# Altium PCB plp-ctop_2d.PcbDoc
Units mm, origin at the board's own origin, x right, y up, seen from the top; angles counter-clockwise.
Board outline 35.01 x 41.5 mm, 2 copper layers (Top Layer, Bottom Layer), stack 1.07 mm thick; 8 components, 11 nets, 40 pads, 2 vias.
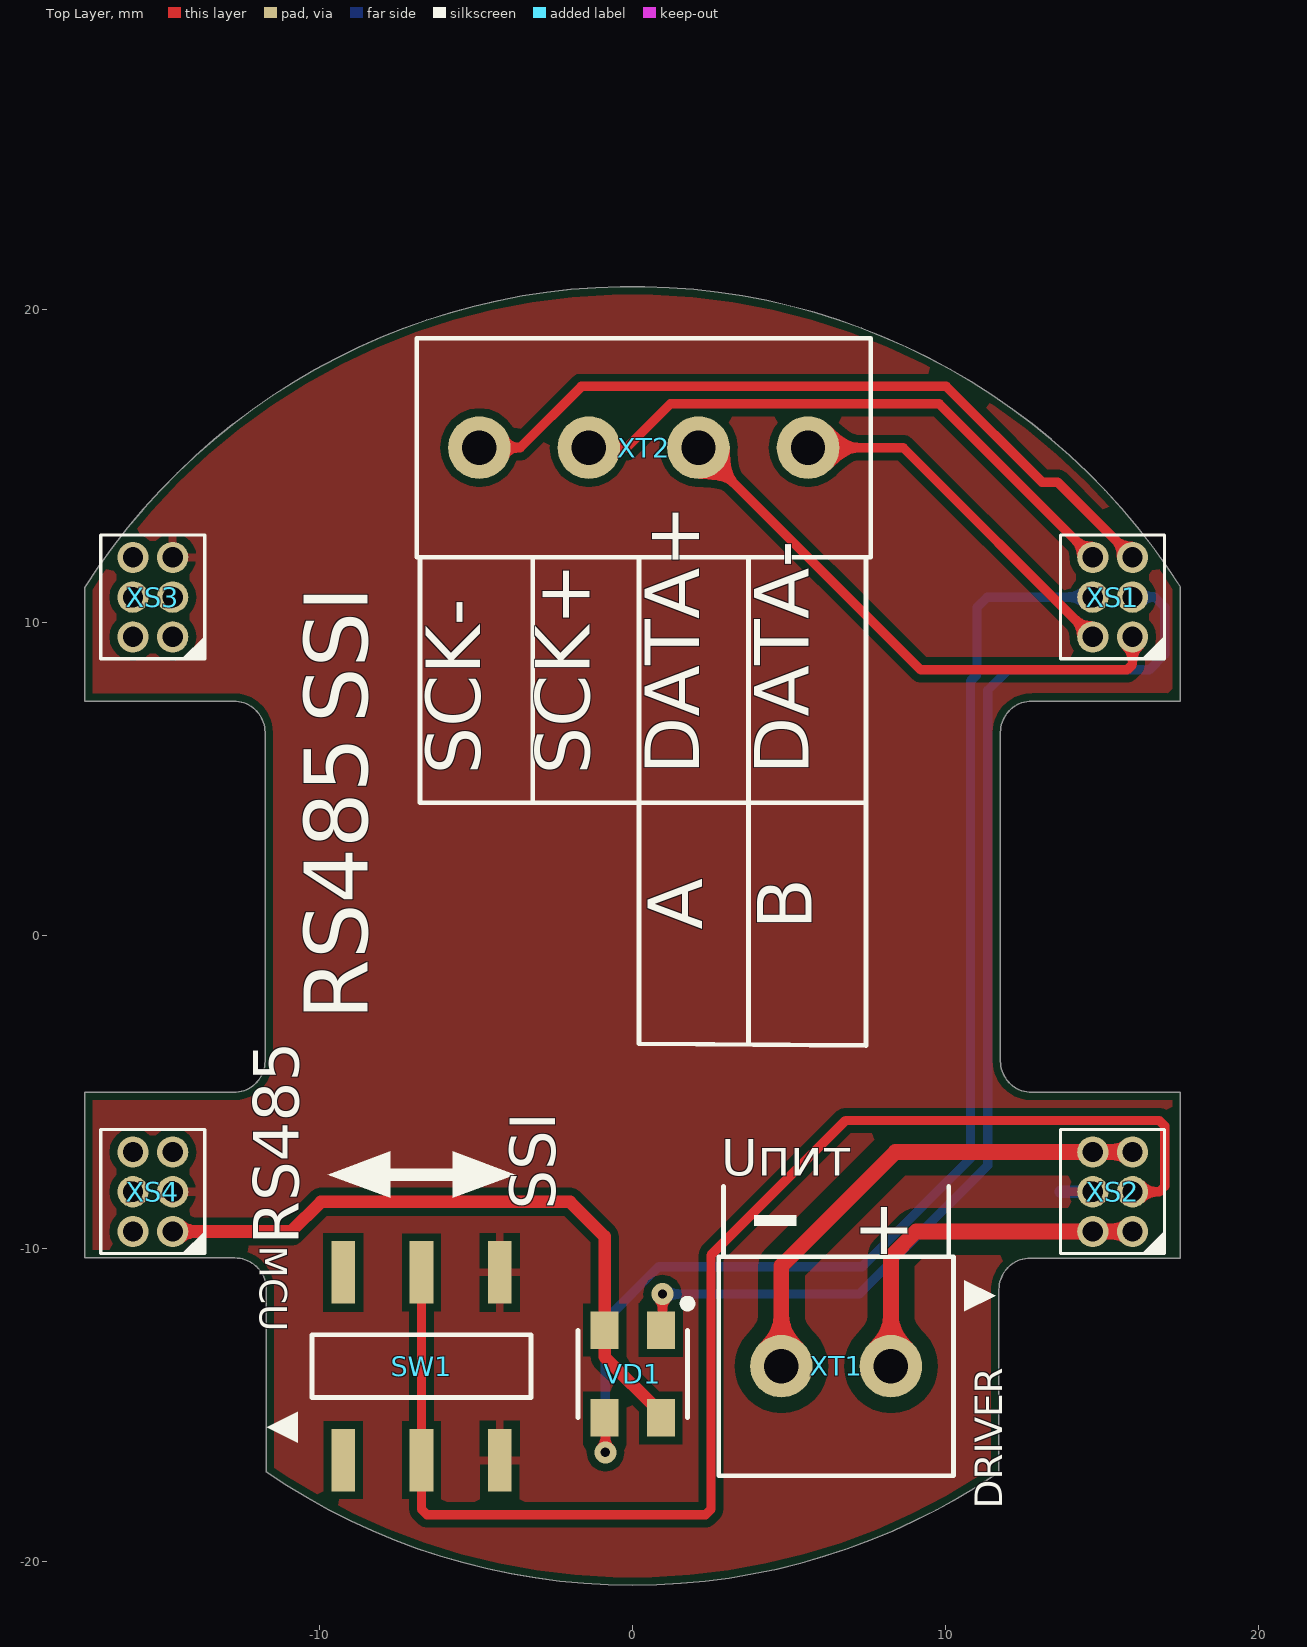
[diagram p0: Top Layer view]
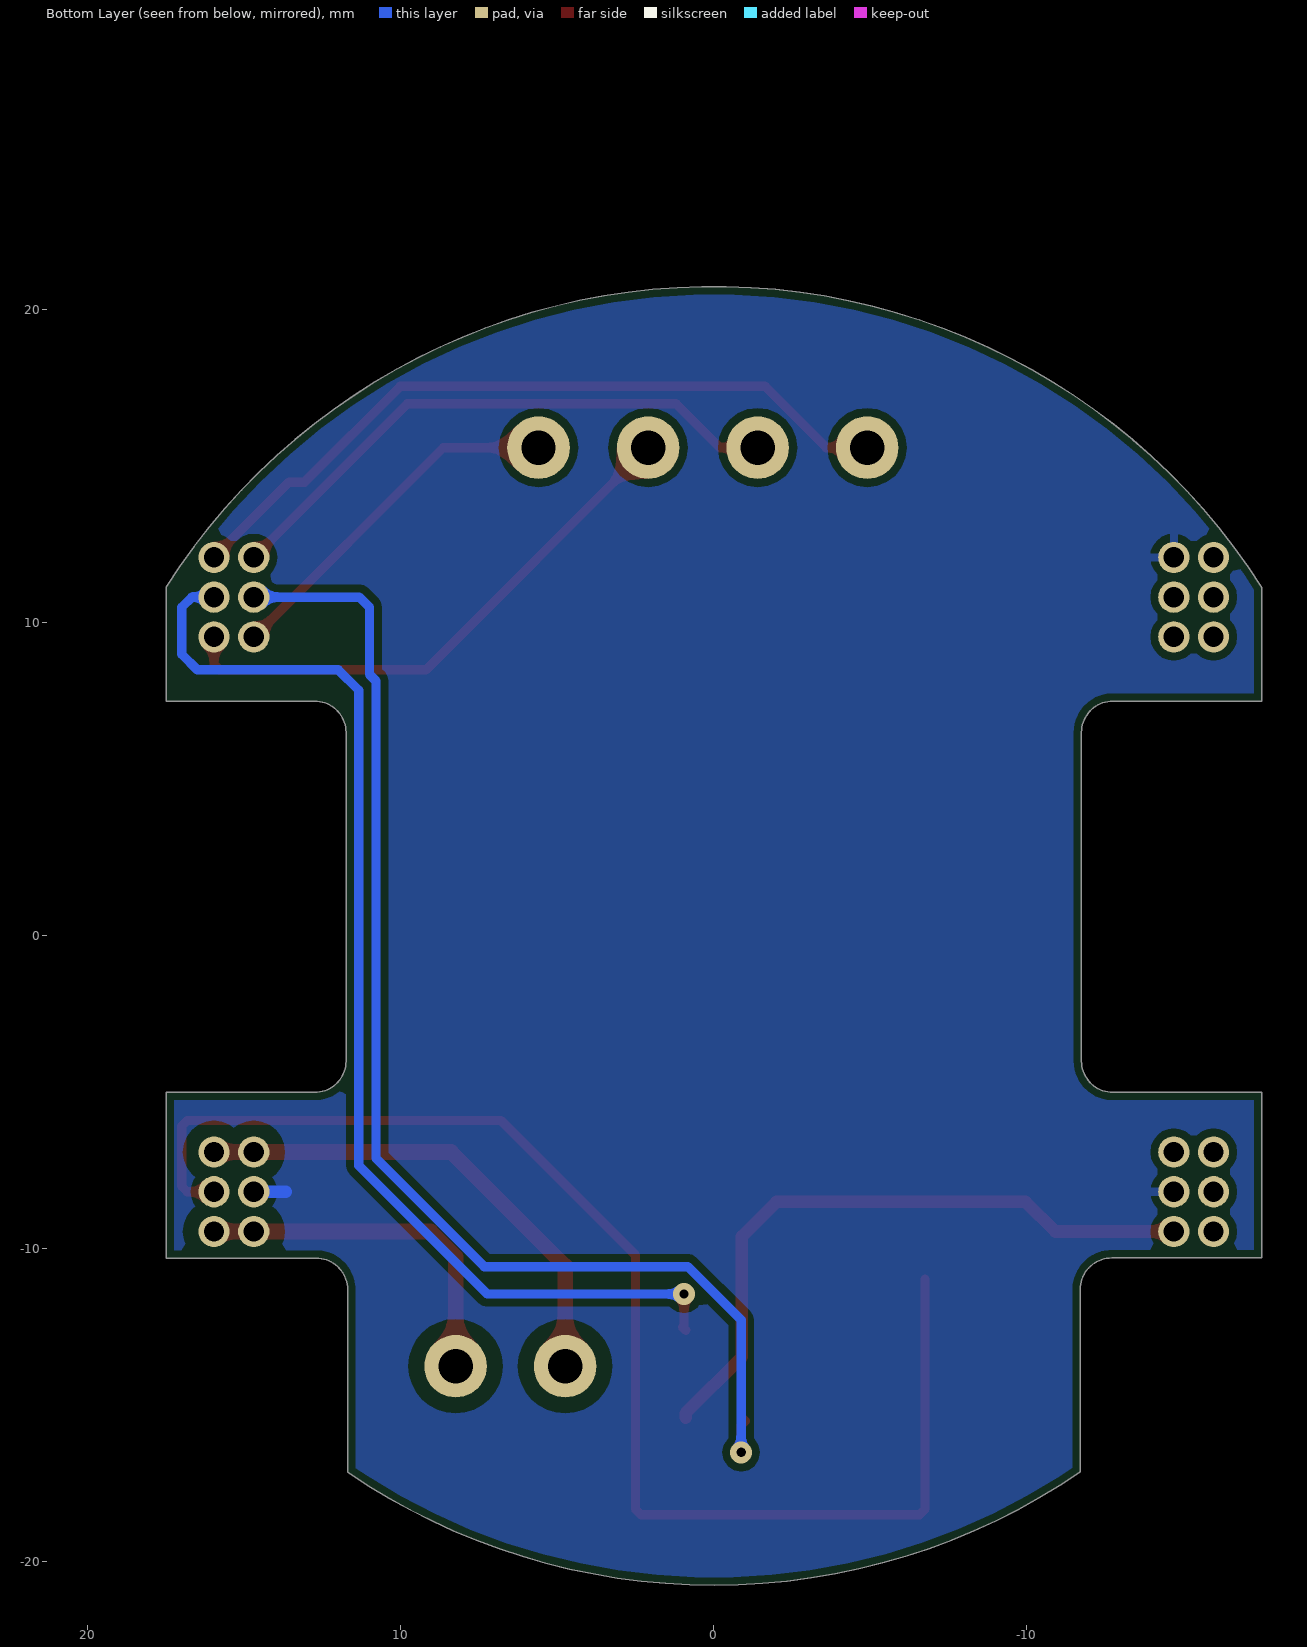
[diagram p1: Bottom Layer view, seen from below]
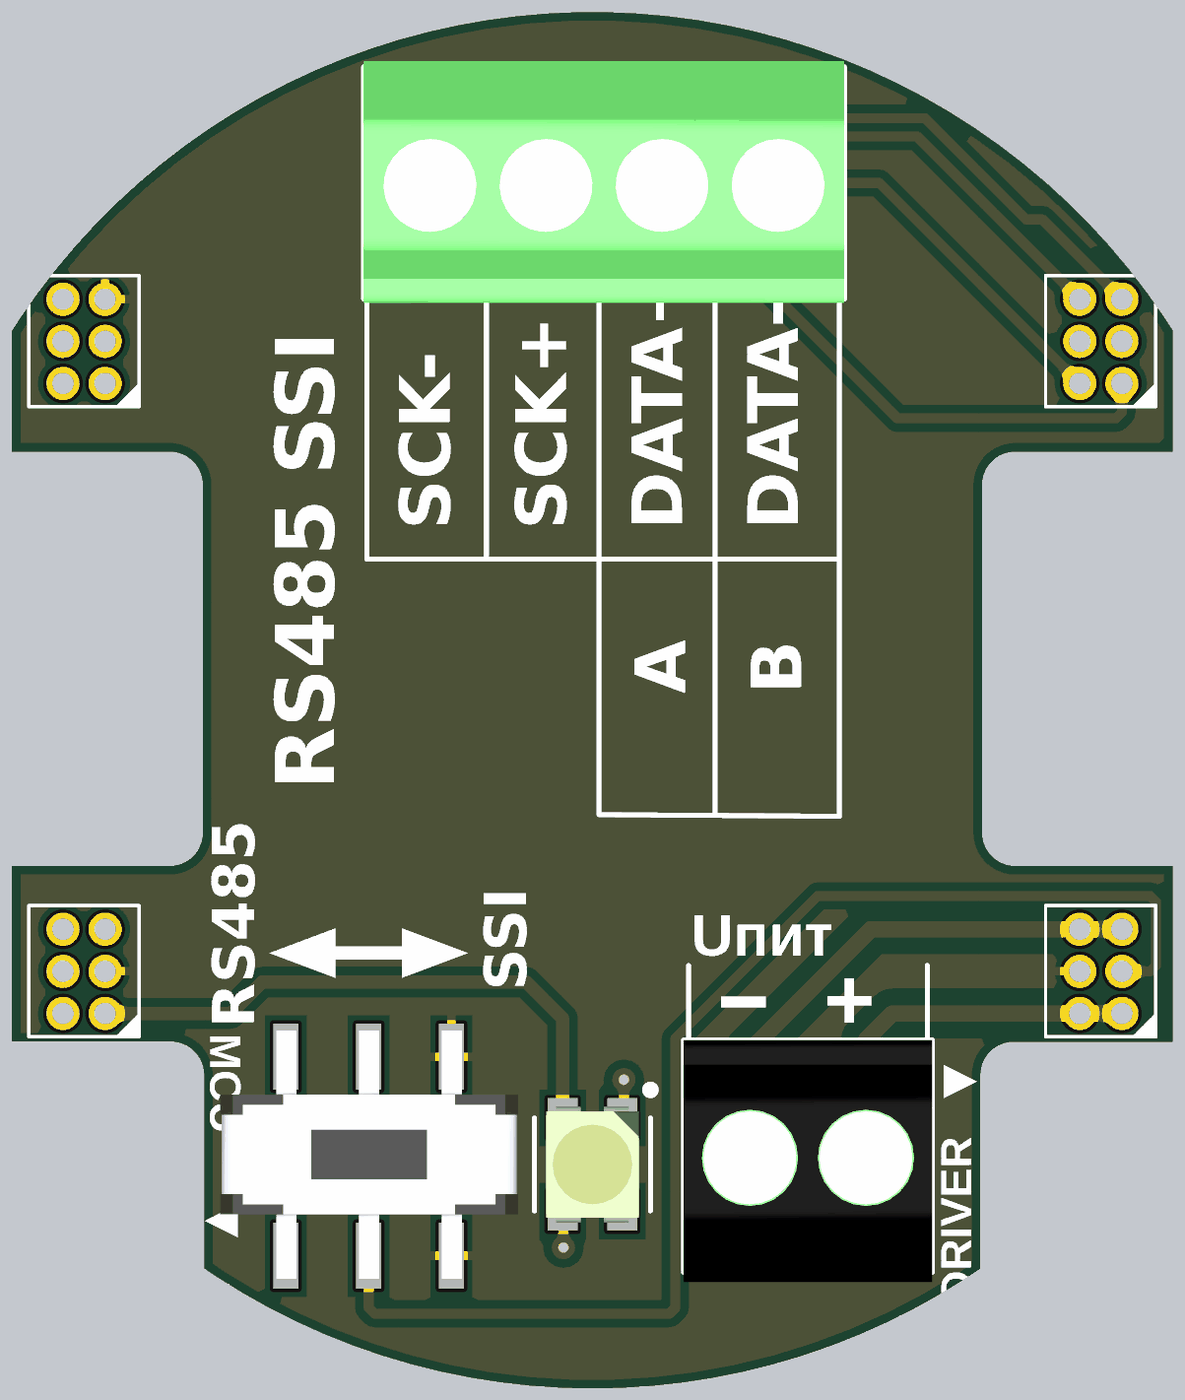
[diagram p2: 3D render of the assembled board from above, using the file's embedded part models]

## Layer stack, top to bottom
Top Solder: solder mask 0.0102, Solder Resist, Dk 3.5
Top Layer: signal copper 0.035
Dielectric1: prepreg 1, FR-4, Dk 4.8
Bottom Layer: signal copper 0.035
Bottom Solder: solder mask 0.0102, Solder Resist, Dk 3.5

## Board outline
-17.511,-10.292 -12.711,-10.292 cw(c-12.711,-11.292) -11.711,-11.292 -11.711,-17.125 -11.713,-17.128 ccw(c0,0) 11.694,-17.141 11.7,-17.141 11.7,-11.3 cw(c12.7,-11.3) 12.7,-10.3 17.5,-10.3 17.5,-5 12.75,-5 cw(c12.75,-4) 11.75,-4 11.75,6.5 cw(c12.75,6.5) 12.75,7.5 17.5,7.5 17.5,11.15 ccw(c0,0) -17.511,11.132 -17.511,7.5 -12.75,7.5 cw(c-12.75,6.5) -11.75,6.5 -11.75,-4 cw(c-12.75,-4) -12.75,-5 -17.511,-5

## Design rules (kind name [scope] priority, off if disabled: settings)
AcuteAngle [All] p1: minimum=4.40000000000000E+0001 checktracksonly=FALSE
BoardOutlineClearance [All] p1: gap=0.254 ignorepadtopadclearanceinfootprint=FALSE
Clearance Clearance_Bound [Not (OnBottomLayer Or OnTopLayer) vs IsBoardCutoutRegion Or IsBoardOutline] p1 off: gap=0.5 ignorepadtopadclearanceinfootprint=FALSE except(0: Arc-Hole Track-Hole SMDPad-Hole THPad-Hole Via-Hole Fill-Hole Poly-Hole Region-Hole Text-Hole)
Clearance Clearance_Poly [InNet('PE')] p2 off: gap=0.5 ignorepadtopadclearanceinfootprint=FALSE except(0: Arc-Hole Track-Hole SMDPad-Hole THPad-Hole Via-Hole Fill-Hole Poly-Hole Region-Hole Text-Hole)
Clearance Clearance_Poly_1 [InNet('-Uп') vs InNet('GND')] p3: gap=0.5 ignorepadtopadclearanceinfootprint=FALSE except(0.254: Arc-Hole Track-Hole SMDPad-Hole THPad-Hole Via-Hole Fill-Hole Poly-Hole Region-Hole Text-Hole)
Clearance Clearance_Poly_2 [InNet('+Uп') vs InNet('GND')] p4: gap=0.5 ignorepadtopadclearanceinfootprint=FALSE except(0.254: Arc-Hole Track-Hole SMDPad-Hole THPad-Hole Via-Hole Fill-Hole Poly-Hole Region-Hole Text-Hole)
Clearance Clearance_Poly_3 [InNet('OUT')] p5 off: gap=0.5 ignorepadtopadclearanceinfootprint=FALSE except(0: Arc-Hole Track-Hole SMDPad-Hole THPad-Hole Via-Hole Fill-Hole Poly-Hole Region-Hole Text-Hole)
Clearance Clearance_in [(OnLayer('MidLayer1') OR OnLayer('MidLayer2'))] p6 off: gap=0.2 ignorepadtopadclearanceinfootprint=FALSE except(0: Arc-Hole Track-Hole SMDPad-Hole THPad-Hole Via-Hole Fill-Hole Poly-Hole Region-Hole Text-Hole)
Clearance Clearance_out [(OnLayer('Bottom Layer') OR OnLayer('Top Layer'))] p7: gap=0.254 ignorepadtopadclearanceinfootprint=FALSE except(0: Arc-Hole Track-Hole SMDPad-Hole THPad-Hole Via-Hole Fill-Hole Poly-Hole Region-Hole Text-Hole)
HoleSize [All] p1: absolutevalues=TRUE maxlimit=2.54 minlimit=0.2 maxpercent=80.000 minpercent=20.000
MinimumAnnularRing [All] p1: minimumring=0.2
MinimumSolderMaskSliver [All] p1: minsoldermaskwidth=0
NetAntennae [All] p1: netantennaetolerance=5
PermittedLayers [All] p1: toplayerpermitted=TRUE bottomlayerpermitted=TRUE
PolygonConnect PolygonConnect_via [isvia] p1: connectstyle=Direct reliefconductorwidth=0.254 reliefentries=4 polygonreliefangle="90 Angle" airgapwidth=0.254
PolygonConnect [All] p2: connectstyle=Relief reliefconductorwidth=0.254 reliefentries=4 polygonreliefangle="90 Angle" airgapwidth=0.254
RoutingVias [All] p1: holewidth=0.3 width=0.8 viastyle="Through Hole" minholewidth=0.2 minwidth=0.6 maxholewidth=0.4 maxwidth=1.27
SMDNeckDown [All] p1: percent=100.000
SMDToCorner [All] p1: distance=59055
SMDToPlane [All] p1: distance=0
ShortCircuit [All] p1: allowed=TRUE
SilkToSilkClearance [All] p1: silktosilkclearance=0.15
SilkToSolderMaskClearance SilkscreenOverComponentPads [IsPad] p1: minsilkscreentomaskgap=0.15 clearancetoexposedcopper=TRUE
SolderMaskExpansion [All] p1: expansion=0.1 istentingtop=FALSE
UnRoutedNet [All] p1: checkbadconnections=TRUE
ViasUnderSMD [All] p1: allowed=TRUE
Width [All] p1: maxlimit=3 minlimit=0.15 preferedwidth=0.25 minimp=50.000000 maximp=50.000000 favimp=50.000000
23 further rules are at their usual default settings.

## Components (designator, comment, footprint, x,y, rotation, side; value= is the part's Value field where it differs from the comment)
SW1 "JS202011SCQN" JS202011SCQN -9.25,-16.75 r0 top
VD1 "Dual LED" KAA-3528 0,-14 r90 top locked
XS1 "PLLD-6" "CON: PLL-6(2x3R1.27female)" 17.012,8.8 r90 top locked
XS2 "2199R05-06G-301523" "CON: PLL-6(2x3R1.27female)" 17.012,-10.2 r90 top locked
XS3 "2199R05-06G-301523" "CON: PLL-6(2x3R1.27female)" -13.658,8.8 r90 top
XS4 "2199R05-06G-301523" "CON: PLL-6(2x3R1.27female)" -13.658,-10.2 r90 top
XT1 "MKDS 1/2 - 3,5" "MKDS 1/2 - 3,5" 8.25,-13.75 r180 top
XT2 "MKDS 1/4 - 3,5" "MKDS 1/4 - 3,5" -4.9,15.6 r0 top

## Footprints (in the part's own frame and the unit in brackets; to place one, negate y for a bottom-side part, rotate by r counter-clockwise, add the part's x,y. Pads: shape width x height; smd on the part's side, far side on the other; paste and mask are expansions set on the pad)
"CON: PLL-6(2x3R1.27female)" [mm]
  round 1 hole 0.65: 1(0.754,1.042) 2(0.754,2.312) 3(2.024,1.042) 4(2.024,2.312) 5(3.294,1.042) 6(3.294,2.312)
  silkscreen extent 0.05,0.02 4.01,3.34
JS202011SCQN [mm]
  rect 0.76x2 smd: 1(0,0) 2(2.5,0) 3(5,0) 4(5,6) 5(2.5,6) 6(0,6)
  silkscreen extent -1,2 6,4, body extent -1.98,-0.7 7.01,6.79, height 5.51
KAA-3528 [mm]
  rect 1.2x0.9 smd: 1(1.4,-0.9) 2(-1.4,-0.9) 3(-1.4,0.9) 4(1.4,0.9)
  silkscreen extent -1.4,-1.85 2.35,1.75, body extent -1.75,-1.4 1.75,1.4, height 1.9
"MKDS 1/2 - 3,5" [mm]
  round 2 hole 1.1: 1(0,0) 2(3.5,0)
  silkscreen extent -2,-3.5 5.5,3.5, body extent -2,-3.5 5.5,3.8, height 8.5
"MKDS 1/4 - 3,5" [mm]
  round 2 hole 1.1: 1(0,0) 2(3.5,0) 3(7,0) 4(10.5,0)
  silkscreen extent -2,-3.5 12.5,3.5, body extent -2,-3.62 12.5,3.68, height 8.5

## Part data
SW1: "Переключатель", Manufacturer="C&K Component", ReplacementPart1Manufacturer=Китай, ReplacementPart1PartNumber=is-1390, ComponentLink1Description="Data Sheet", ComponentLink1URL=http://www.tycoelectronics.com/catalog/pn/en/1571983-4?RQPN=1571983-4, ComponentLink2Description="Replacement 1 DataSheet"
VD1: "2-1 RED, 4-3 GREEN", ComponentLink1Description=Datasheet, ComponentLink1URL=https://static.chipdip.ru/lib/935/DOC011935168.pdf
XS1: library part PLLD-6(Female), "Step 1.27"
XS2 XS3 XS4: library part 2199R05-06G-301523In, "Step 1.27"
XT2: ComponentLink1Description=Datasheet, ComponentLink1URL=https://www.phoenixcontact.com/online/portal/ru?uri=pxc-oc-itemdetail:pid=1751248&library=ruru&tab=1

## Via types
v1: diameter 0.7, hole 0.3, Top Layer to Bottom Layer, tented both sides, 2 vias

## Nets (pads, with @x,y where several pads share a name; then routed paths per layer and width w, separated by ;. In a path a pad name is that pad's centre, name@x,y a point inside that pad or via, vN(x,y) a via of type N, cw(c..) or ccw(c..) an arc to the next point about the centre after c; other vN are vias at no path point)
+Uп: XS2.1 XS2.2 XT1.1 | length 11.6
  Top Layer w0.5: XT1.1 8.25,-10.25 9.054,-9.446 XS2.2 XS2.1
-Uп: XS2.5 XS2.6 XT1.2 | length 15.9
  Top Layer w0.5: XT1.2 4.75,-10.55 8.394,-6.906 XS2.6 XS2.5
A: XS1.1 XT2.3 | length 17.8
  Top Layer w0.3: XT2.3 9.2,8.5 15.794,8.5 15.97,8.676 XS1.1
B: XS1.2 XT2.4 | length 11.6
  Top Layer w0.3: XT2.4 8.645,15.6 14.691,9.554 XS1.2
GND: SW1.3 SW1.4 XS2.4 XS3.5 XS4.3 | length 1.3
  Top Layer w0.3: XS3.5 XS3.5@-14.594,12.094 ; XS2.4@14.693,-8.169 XS2.4
  Bottom Layer w0.3: XS3.5 XS3.5@-14.594,12.094 ; XS2.4@14.693,-8.169 XS2.4
  Bottom Layer w0.4: 13.669,-8.169 XS2.4@14.693,-8.169
GPIO0: SW1.2 SW1.5 XS2.3 | length 44.3
  Top Layer w0.3: SW1.5@-6.75,-10.964 SW1.2 -6.75,-18.324 -6.574,-18.5 2.324,-18.5 2.5,-18.324 2.5,-10.2 6.8,-5.9 16.824,-5.9 17,-6.076 17,-8.001 16.824,-8.176 XS2.3
GREEN_LED: VD1.3 XS1.4 | length 40.8
  Top Layer w0.3: VD1.3 -1,-15.5 -0.875,-15.625 v1(-0.875,-16.506)
  Bottom Layer w0.3: v1(-0.875,-16.506) -0.875,-12.273 0.83,-10.569 7.331,-10.569 10.792,-7.108 10.792,8.146 11,8.354 11,10.5 11.324,10.824 XS1.4
LED: VD1.2 VD1.4 XS4.1 | length 21.2
  Top Layer w0.4: XS4.1 -10.913,-9.446 -9.967,-8.5 -2,-8.5 -0.9,-9.6 -0.9,-11.746 VD1.4 -0.9,-13.45 0.9,-15.25 VD1.2
RED_LED: VD1.1 XS1.3 | length 37.3
  Top Layer w0.3: VD1.1 1,-12.5 0.95,-12.45 v1(0.95,-11.444)
  Bottom Layer w0.3: v1(0.95,-11.444) 7.239,-11.444 11.346,-7.337 11.346,7.846 12,8.5 16.5,8.5 17,9 17,10.5 16.676,10.824 XS1.3
SCK_A: XS1.5 XT2.1 | length 23.9
  Top Layer w0.3: XT2.1 -3.6,15.6 -1.642,17.558 10.019,17.558 13.077,14.5 13.572,14.5 15.97,12.102 XS1.5
SCK_B: XS1.6 XT2.2 | length 18.7
  Top Layer w0.3: XT2.2 -0.2,15.6 1.204,17.004 9.789,17.004 XS1.6
pads on no net: SW1.1 SW1.6 XS3.1 XS3.2 XS3.3 XS3.4 XS3.6 XS4.2 XS4.4 XS4.5 XS4.6

## Polygon pours and split planes (outlines as drawn)
GND on Top Layer "GND_L01_P002" (solid, pour order 2): -18,21 17.5,21 17.5,-21 -18,-21
GND on Bottom Layer "GND_L02_P003" (solid, remove dead copper, pour order 3): -18,21 17.5,21 17.5,-21 -18,-21
no net on Top Overlay "NONET_L02_P-001" (solid): -9.25,-7.375

## Other copper
Top Layer:
  region: 20.1,27.9
  region: 20.1,27.9
  region: 20.1,27.9
  region: 20.1,27.9
  region: 20.1,27.9
  region: 20.1,27.9
  region: 20.1,27.9
  region: 20.1,27.9
  region: 20.1,27.9
  region: 20.1,27.9
  region: 20.1,27.9
  region: 20.1,27.9
  region: 20.1,27.9

## Silkscreen, mask and mechanical layers (free items; w line width, h text height)
Top Overlay:
  region: -10.7,-16.2 -11.7,-15.7 -10.7,-15.2
  region: 10.6,-11 11.6,-11.5 10.6,-12
  region: 13,-11.5
  region: -3.75,-7.625 -5.75,-8.375 -5.75,-6.875
  region: -9.75,-7.625 -7.75,-6.875 -7.75,-8.375
  region: 3.875,-8.931 3.875,-9.269 5.225,-9.269 5.225,-8.931
  lines w0.15: -6.8,12 -6.8,4.25 7.45,4.25 ; -3.2,4.35 -3.2,12.1 ; 0.2,12 0.2,4.3 0.2,-3.45 7.45,-3.5 7.45,4.25 ; 2.9,-10.225 2.9,-8 ; 3.7,-3.4 3.7,4.25 3.7,12 ; 7.45,12 7.45,4.25 ; 10.1,-10.225 10.1,-8
  lines w0.4: -8.75,-7.625 -5.151,-7.625
  text "SSI" at -7.8,6.8 h3.5 r90
  text "SCK-" at -4.3,5.147 h3 r90
  text "SCK+" at -0.8,5.147 h3 r90
  text "DATA+" at 2.7,5.147 h3 r90
  text "DATA-" at 6.2,5.147 h3 r90
  text "A" at 2.8,0.2 h3 r90
  text "B" at 6.3,0.2 h3 r90
  text "RS485" at -7.8,-2.7 h3.5 r90
  text "Uпит" at 2.825,-8.051 h2
  text "SSI" at -2,-8.75 h2.5 r90
  text "RS485" at -10.2,-9.874 h2.5 r90
  text "MCU" at -12.2,-9.9 h1.5 r270
  text "+" at 7.025,-10.75 h3
  text "DRIVER" at 12.1,-18.3 h1.5 r90
Bottom Solder:
  circle w0: c0,0 r10
  region: -10,0 ccw(c0,0) 0,-10 ccw(c0,0) 10,0 ccw(c0,0) 0,10 ccw(c0,0)
Mechanical 3:
  circle w0.15: c0,0 r10
  circle w0.15: c-17,0 r2
  circle w0.15: c16.5,0 r2
  lines w0.1: -11.4,-17 -11.4,17 ; -10.4,-17 -10.4,17 ; 10.375,-17 10.375,17 ; 11.375,-17 11.375,17
Mechanical 4:
  lines w0.15: -12.761,-5 -17.511,-5 -17.511,-9.492 -17.511,-10.292 -12.711,-10.292 cw(c-12.711,-11.292) -11.711,-11.292 -11.711,-17.125 ; -12.761,7.5 -17.511,7.5 -17.511,11.132 cw(c0,0) 17.5,11.15 17.5,7.5 12.75,7.5 ccw(c12.75,6.5) 11.75,6.5 11.75,-4 ccw(c12.75,-4) 12.75,-5 17.5,-5 17.5,-9.5 17.5,-10.3 12.7,-10.3 ccw(c12.7,-11.3) 11.7,-11.3 11.7,-17.141 ; -12.75,-5 ccw(c-12.75,-4) -11.75,-4 -11.75,6.5 ccw(c-12.75,6.5) -12.75,7.5 ; -11.713,-17.128 ccw(c0,0) 11.694,-17.141 ; 10.7,-15.75 10.7,-14.65
Mechanical 15:
  region: 0.5,-12.5 1.753,-13.753 1.753,-12.5
  region: 1,-12.5
  lines w0.2: -2,-15.5 1.765,-15.5 1.765,-12.5 -2,-12.5 -2,-15.5
  text "XT2" at -7,10.5 h2
  text "SW1" at -9.5,-9.5 h2
  text "XT1" at 2,-9.5 h2
  text "VD1" at -1,-12 h2